# Altium PCB MainBoard.PcbDoc (part 2 of 5)
Units mm, origin at the board's own origin, x right, y up, seen from the top; angles counter-clockwise.
Board outline 82.15 x 81.5 mm, 4 copper layers (Top Layer, GND Top, GND Bot, Bottom Layer), stack 1.57 mm thick; 116 components, 97 nets, 468 pads, 3117 vias.
Unrouted connection lines stored in the file: 5.
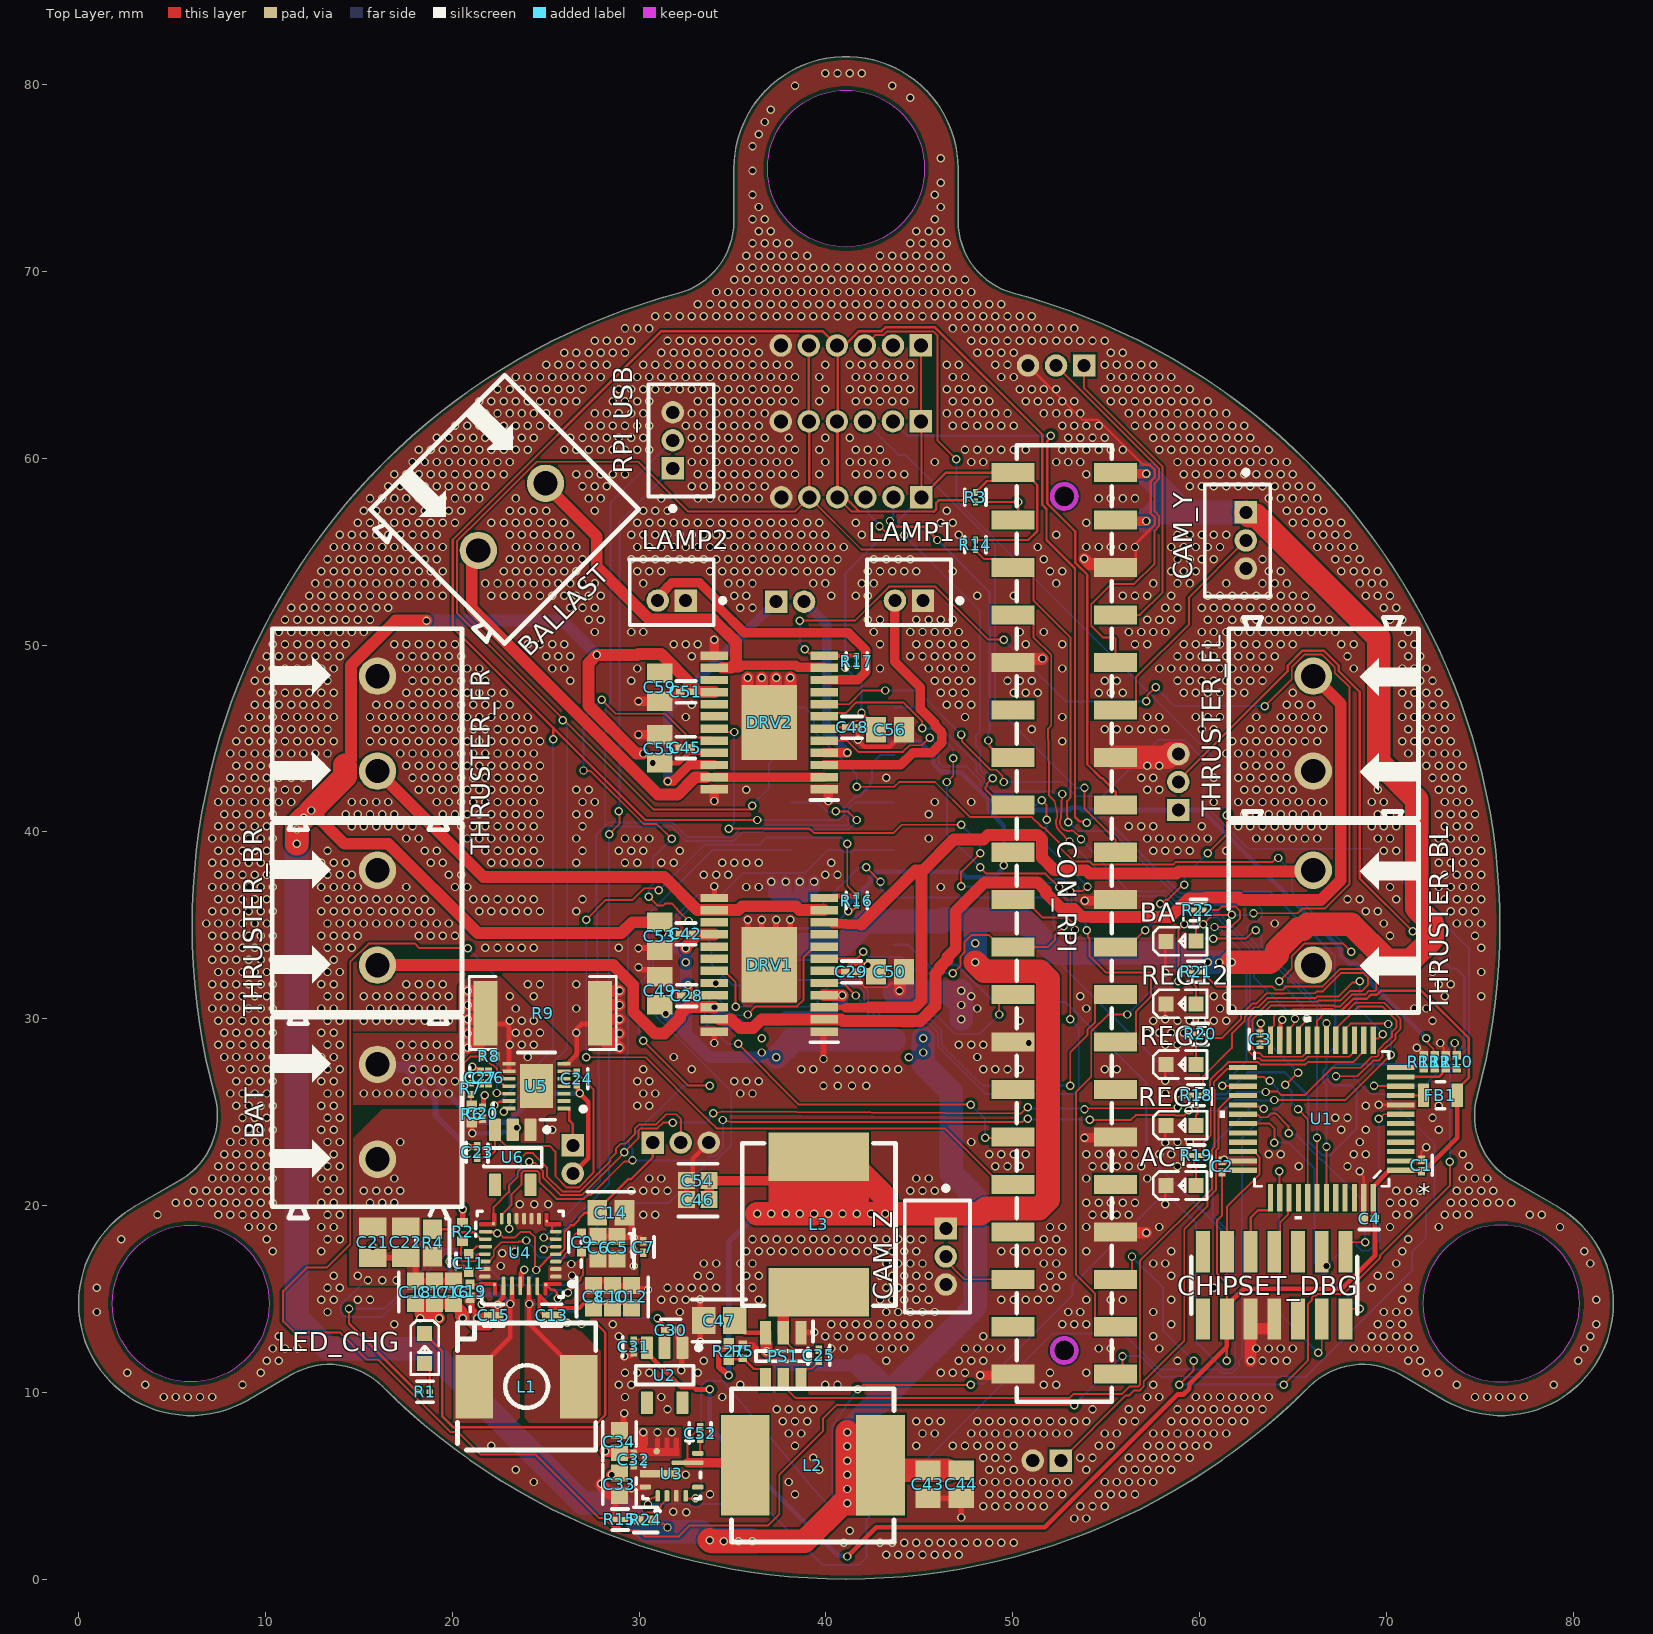
[diagram p0: Top Layer view]

## Via types
v1: diameter 0.45, hole 0.3, Top Layer to Bottom Layer, tented both sides, 3113 vias
v2: diameter 0.45, hole 0.3, Top Layer to Bottom Layer, 4 vias

## Nets (pads, with @x,y where several pads share a name; then routed paths per layer and width w, separated by ;. In a path a pad name is that pad's centre, name@x,y a point inside that pad or via, vN(x,y) a via of type N, cw(c..) or ccw(c..) an arc to the next point about the centre after c; other vN are vias at no path point) (continued)
+12: (continued)
  Bottom Layer w0.635: v1(18.623,51.308) 25.908,51.308 v1(27.743,49.473) ; v1(31.242,34.592) 32.052,33.782 v1(32.512,33.782) v1(32.512,33.02) 32.512,29.211 ; v1(31.422,30.275) 31.449,30.275 32.512,29.211 ; v2(36.83,12.192) 37.57,11.452 41.887,11.452 ; v1(37.338,27.94) 33.783,27.94 32.512,29.211
  Bottom Layer w1.27: v1@11.665,39.37 11.665,14.049 13.383,12.331 18.718,12.331 26.985,4.064 28.956,4.064 30.48,2.54 33.331,2.54 v1(33.778,2.093) 36.007,2.093 v1(36.068,2.032) ; v1(11.684,39.37) v1(11.684,40.132) 11.684,40.386 v1(12.056,40.758) v1(12.446,41.148) ; v1(37.338,27.94) 37.356,27.94 38.1,28.684 38.1,28.821 CON_IBOARD_F.3@38.159,28.88 CON_IBOARD_F.18@43.659,28.88 ; v1(41.148,7.874) 42.881,9.607 42.881,10.457 ; 41.887,11.452 42.792,10.547 ; 42.881,9.48 48.006,14.605 48.006,20.457 46.717,21.746 46.717,26.084 45.212,27.589 v1(45.212,28.194) v1(45.212,28.956)
  other v1: 44.45,27.94 36.576,28.194 36.576,28.956
BALLAST_HS: BALLAST.1 DRV2.2 DRV2.23 | length 26.3
  Top Layer w0.508: DRV2.23@34.036,42.933 34.036,42.926 34.043,42.933 DRV2.2@39.912,42.933
  Top Layer w0.635: BALLAST.1@21.046,55.336 21.046,51.976 31.023,41.999 32.069,41.999 32.997,42.927 DRV2.23@33.616,42.927
BALLAST_LS: BALLAST.2 DRV2.11 DRV2.14 | length 22.7
  Top Layer w0.508: DRV2.14@34.456,48.777 34.947,48.777 35.193,48.777 35.379,48.777 35.415,48.812 35.535,48.933 38.379,48.933 38.5,48.812 39.883,48.812 DRV2.11@39.912,48.783
  Top Layer w0.635: BALLAST.2@24.638,58.928 27.739,55.827 27.739,54.202 30.578,51.363 33.98,51.363 35.193,50.15 35.193,49.034 35.157,48.999 34.947,48.789 DRV2.14@34.456,48.789
BALLAST_POT: BALLAST_POT.2 U1.10 | length 42.5
  Top Layer w0.127: BALLAST_POT.2@58.87,42.672 58.87,42.763 64.723,48.616 64.723,48.903 65.524,49.704 66.658,49.704 67.459,48.903 67.459,48.619 68.58,47.498 68.58,37.514 v1(71.415,34.679) ; v1(69.342,26.416) 69.356,26.402 70.75,26.402 U1.10@70.764,26.388
  Bottom Layer w0.127: v1(69.342,26.416) 72.031,26.416 74.168,28.553 74.168,32.258 73.74,32.686 73.439,32.686 71.446,34.679 v1(71.415,34.679)
BATCHG_BATP: R4.1 U4.18 | length 3
  Top Layer w0.127: R4.1@18.953,18.729 20.139,18.729 20.307,18.561 21.17,18.561 21.397,18.334 21.412,18.334 21.547,18.199 U4.18@21.772,18.199
BATCHG_BTST1: C9.1 U4.4 | length 2.1
  Top Layer w0.102: U4.4@25.547,16.999 25.747,16.999 26.007,17.258 26.007,17.349 26.228,17.57 26.228,18.092 26.67,18.534
BATCHG_BTST2: C11.2 U4.19 | length 1
  Top Layer w0.102: C11.2@20.93,17.569 21.049,17.569 21.279,17.799 U4.19@21.787,17.799
BATCHG_INT: CON_IBOARD_F.15 U1.18 U4.21 | length 73.9
  Top Layer w0.102: U4.21@21.747,16.999 21.947,16.999 22.227,17.279 22.227,17.613 22.28,17.665 22.28,17.693 22.62,18.034 23.541,18.034 23.592,18.085 23.927,18.085 v1(23.969,18.127) ; v1(42.164,38.1) v1(42.926,37.338) ; v1(60.746,34.29) 62.484,34.29 62.939,34.745 v1(63.011,34.745) ; U1.18@66.798,28.854 66.8,28.856 v1(66.8,29.769)
  Bottom Layer w0.102: v1(23.969,18.127) 24.367,17.73 24.367,17.543 24.698,17.212 26.084,17.212 29.006,20.134 31.564,20.134 33.842,22.412 34.13,22.412 34.937,23.22 34.937,26.122 31.254,29.805 31.227,29.805 30.952,30.08 30.952,30.107 30.734,30.325 30.734,34.749 31.047,35.062 31.437,35.062 31.441,35.058 31.851,35.058 32.209,35.415 32.209,35.418 32.628,35.838 39.518,35.838 41.78,38.1 v1(42.164,38.1) ; v1(42.926,37.338) 42.926,36.959 43.385,36.5 CON_IBOARD_F.15@43.659,36.5 51.63,36.5 51.69,36.44 52.195,35.935 52.195,35.411 52.195,35.018 52.286,34.927 52.286,34.773 52.55,34.509 52.703,34.509 52.922,34.29 v1@60.745,34.29 ; v1(63.011,34.745) 63.038,34.745 63.327,34.456 63.327,33.863 66.497,30.694 66.497,30.072 v1(66.8,29.769)